# Altium PCB pagerboardv2.PcbDoc
Units mil, origin at the board's own origin, x right, y up, seen from the top; angles counter-clockwise.
Board outline 2250 x 5120 mil, 2 copper layers (Top Layer, Bottom Layer); 26 components, 26 nets, 107 pads, 24 vias.
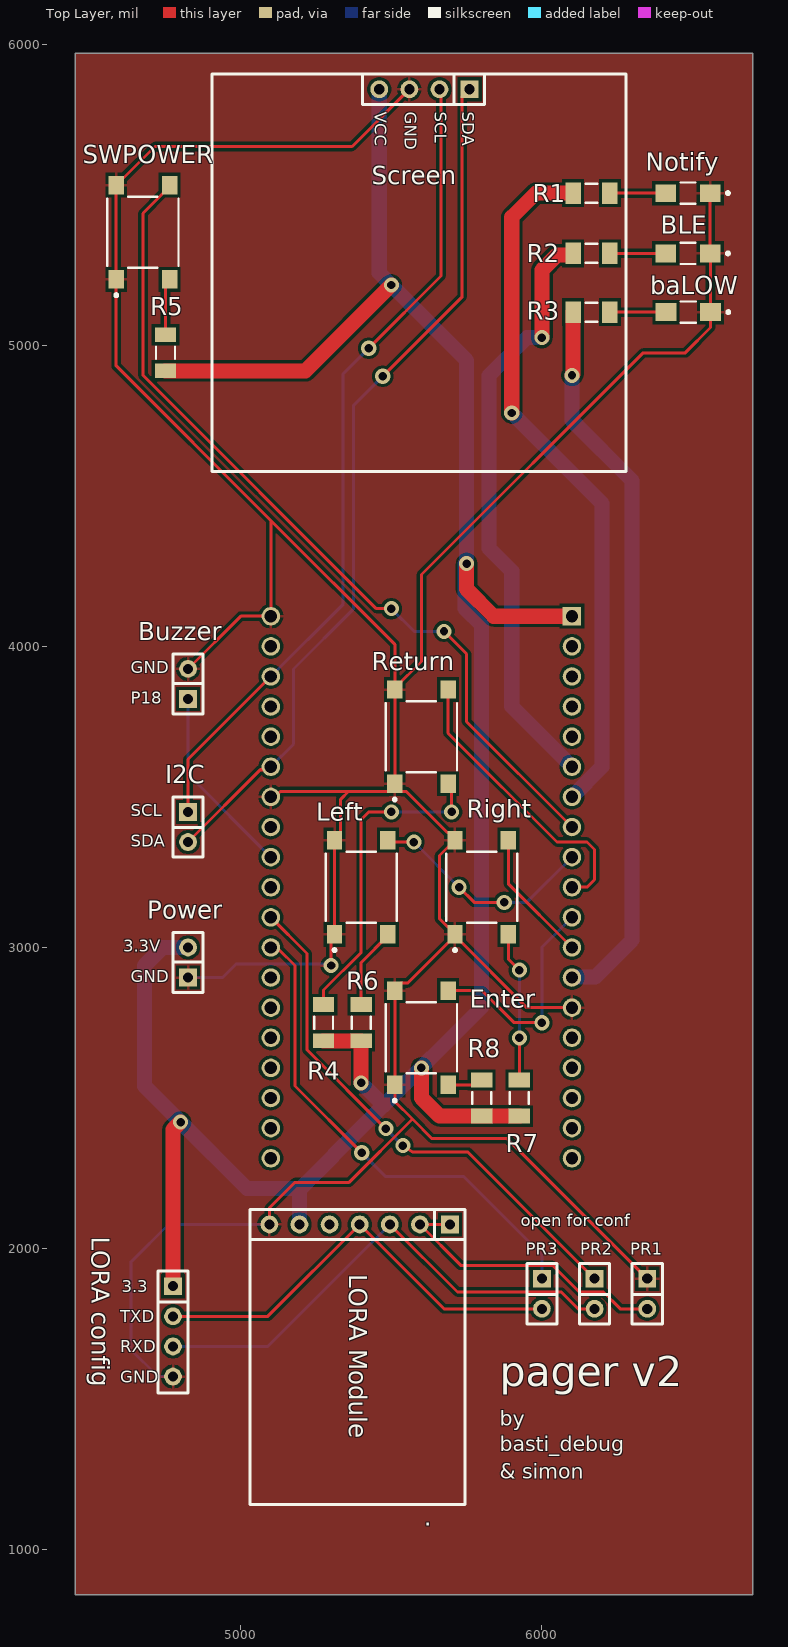
[diagram p0: Top Layer view]
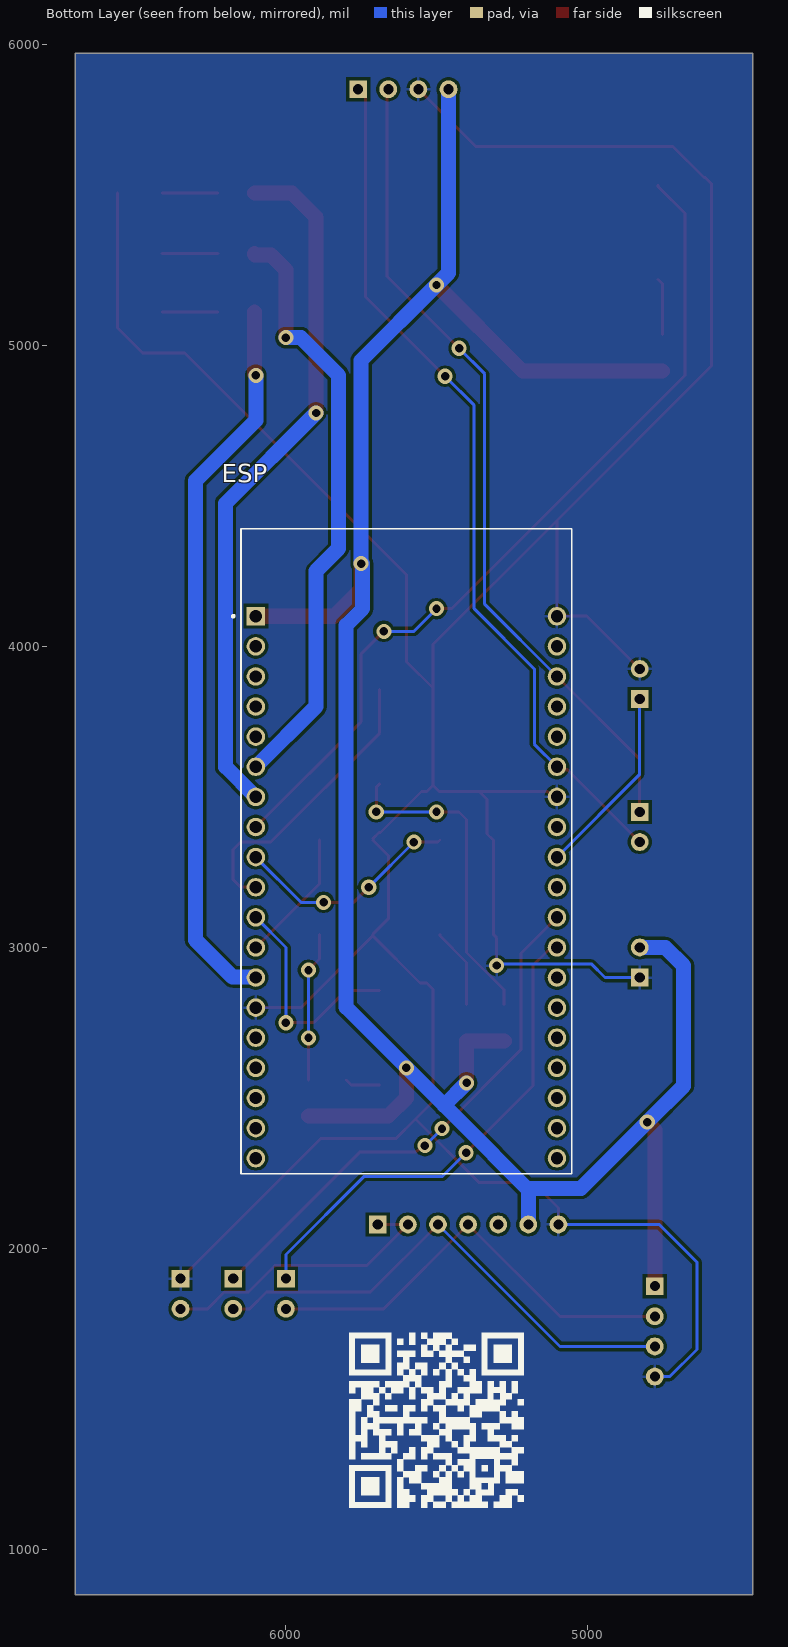
[diagram p1: Bottom Layer view, seen from below]

## Layer stack, top to bottom
Top Solder: solder mask 0.4, Solder Resist, Dk 3.5
Top Layer: signal copper 1.4
Dielectric 1: dielectric 12.6, FR-4, Dk 4.8
Bottom Layer: signal copper 1.4
Bottom Solder: solder mask 0.4, Solder Resist, Dk 3.5

## Board outline
4450,5970 6700,5970 6700,850 4450,850

## Design rules (kind name [scope] priority, off if disabled: settings)
Clearance [All] p1: gap=10 ignorepadtopadclearanceinfootprint=FALSE except(0: Arc-Hole Track-Hole SMDPad-Hole THPad-Hole Via-Hole Fill-Hole Poly-Hole Region-Hole Text-Hole)
PolygonConnect [All] p1: connectstyle=Relief reliefconductorwidth=10 reliefentries=4 polygonreliefangle="90 Angle" airgapwidth=10
RoutingVias [All] p1: holewidth=28 width=50 viastyle="Through Hole" minholewidth=28 minwidth=50 maxholewidth=28 maxwidth=50
SolderMaskExpansion [All] p1: expansion=4 istentingtop=FALSE
Width [All] p1: maxlimit=50 minlimit=10 preferedwidth=50 minimp=50.000000 maximp=50.000000 favimp=50.000000
30 further rules are at their usual default settings.

## Classes and differential pairs
component class pagerv2: 23 . ESP "LORA config" Power PR1 PR2 PR3
component class pagerv2IO: Buzzer Enter I2C Left R1 Return Right

## Components (designator, comment, footprint, x,y, rotation, side; value= is the part's Value field where it differs from the comment)
. "LORAModule" LORAmodule 5350,2075 r180 top
baLOW "APTD3216CGCK" FP-APTD3216CGCK-MFG 6486.18,5110 r180 top (schematic designator BatteryLow)
BLE "APTD3216CGCK" FP-APTD3216CGCK-MFG 6485,5305 r180 top (schematic designator Bluetooth)
Buzzer "2pin" 2PIN 4825,3875 r90 top
Enter "PTS645SH50SMTR92LFS" FP-PTS645SH50SMTR92LFS-MFG 5600,2700 r90 top
ESP "ESP32-DEVKITC-32D" MODULE_ESP32-DEVKITC-32D 5600,3322.05 r180 bottom (schematic designator U1)
I2C "2pin" 2PIN 4825,3400 r270 top
Left "PTS645SH50SMTR92LFS" FP-PTS645SH50SMTR92LFS-MFG 5400,3200 r90 top
"LORA config" "LoraPins" 4pin 4780,1720 r270 top (schematic designator *)
Notify "APTD3216CGCK" FP-APTD3216CGCK-MFG 6485,5505 r180 top (schematic designator Notification)
Power "2pin" 2PIN 4825,2950 r90 top
PR1 "jumper" jumper 6350,1850 r270 top
PR2 "jumper" jumper 6175,1850 r270 top
PR3 "jumper" jumper 6000,1850 r270 top
R1 "CRCW1206220RFKEA" RESC3216X60X45ML10T20 6165,5505 r0 top
R2 "CRCW1206220RFKEA" RESC3216X60X45ML10T20 6165,5305 r0 top
R3 "CRCW1206220RFKEA" RESC3216X60X45ML10T20 6165,5110 r0 top
R4 "RC1206FR-0710KL" RESC3116X65X40ML10T20 5275,2750 r90 top
R5 "RC1206FR-0710KL" RESC3116X65X40ML10T20 4750,4975 r90 top
R6 "RC1206FR-0710KL" RESC3116X65X40ML10T20 5400,2750 r90 top
R7 "RC1206FR-0710KL" RESC3116X65X40ML10T20 5925,2500 r90 top
R8 "RC1206FR-0710KL" RESC3116X65X40ML10T20 5800,2500 r90 top
Return "PTS645SH50SMTR92LFS" FP-PTS645SH50SMTR92LFS-MFG 5600,3700 r90 top
Right "PTS645SH50SMTR92LFS" FP-PTS645SH50SMTR92LFS-MFG 5800,3200 r90 top
SWPOWER "PTS645SH50SMTR92LFS" FP-PTS645SH50SMTR92LFS-MFG 4675,5375 r90 top
? "Screen" SCREEN 5595,4575 r0 top

## Footprints (in the part's own frame and the unit in brackets; to place one, negate y for a bottom-side part, rotate by r counter-clockwise, add the part's x,y. Pads: shape width x height; smd on the part's side, far side on the other; paste and mask are expansions set on the pad)
2PIN [mm]
  rect 1.5x1.5 hole 0.85: 1(-1.27,0)
  round 1.5 hole 0.85: 2(1.27,0)
  silkscreen extent -2.54,-1.27 2.54,1.27
4pin [mm]
  rect 1.5x1.5 hole 0.85: 1(-3.937,-0.127)
  round 1.5 hole 0.85: 2(-1.397,-0.127) 3(1.143,-0.127) 4(3.683,-0.127)
  silkscreen extent -5.21,-1.4 5.08,1.14
FP-APTD3216CGCK-MFG [mm]
  rect 1.75x1.5 smd paste+0 mask+0: 1(-1.875,0) 2(1.875,0)
  silkscreen extent -3.5,-0.9 0.63,0.9, body extent -2.85,-1 2.85,1, height 0.25
FP-PTS645SH50SMTR92LFS-MFG [mm]
  rect 1.55x1.3 smd paste+0 mask+0: 1(-3.975,2.25) 2(3.975,2.25) 3(-3.975,-2.25) 4(3.975,-2.25)
  silkscreen extent -5.42,-3 3,3, body extent -4.85,-3.1 4.85,3.1, height 0.25
jumper [mm]
  rect 1.5x1.5 hole 0.85: 1(-1.27,0)
  round 1.5 hole 0.85: 2(1.27,0)
  silkscreen extent -2.54,-1.27 2.54,1.27
LORAmodule [mm]
  round 1.5 hole 0.85: AUX(1.397,-0.127) GND(6.477,-0.127) M1(-6.223,-0.127) RXD(-3.683,-0.127) TXD(-1.143,-0.127) VCC(3.937,-0.127)
  rect 1.5x1.5 hole 0.85: M0(-8.763,-0.127)
  silkscreen extent -10.03,-1.4 8.13,23.49
MODULE_ESP32-DEVKITC-32D [mm]
  rect 1.56x1.56 / inner round 1.56 / far side rect 1.56x1.56 hole 1.04: J2-1(-12.7,19.76)
  round 1.56 hole 1.04: J2-2(-12.7,17.22) J2-3(-12.7,14.68) J2-4(-12.7,12.14) J2-5(-12.7,9.6) J2-6(-12.7,7.06) J2-7(-12.7,4.52) J2-8(-12.7,1.98) J2-9(-12.7,-0.56) J2-10(-12.7,-3.1) J2-11(-12.7,-5.64) J2-12(-12.7,-8.18) J2-13(-12.7,-10.72) J2-14(-12.7,-13.26) J2-15(-12.7,-15.8) J2-16(-12.7,-18.34) J2-17(-12.7,-20.88) J2-18(-12.7,-23.42) J2-19(-12.7,-25.96) J3-1(12.7,19.76) J3-2(12.7,17.22) J3-3(12.7,14.68) J3-4(12.7,12.14) J3-5(12.7,9.6) J3-6(12.7,7.06) J3-7(12.7,4.52) J3-8(12.7,1.98) J3-9(12.7,-0.56) J3-10(12.7,-3.1) J3-11(12.7,-5.64) J3-12(12.7,-8.18) J3-13(12.7,-10.72) J3-14(12.7,-13.26) J3-15(12.7,-15.8) J3-16(12.7,-18.34) J3-17(12.7,-20.88) J3-18(12.7,-23.42) J3-19(12.7,-25.96)
  silkscreen extent -14.7,-27.25 13.95,27.15, body extent -13.97,-24.8 13.97,30.3, height 7.06
RESC3116X65X40ML10T20 [mm] "Chip Resistor, 2-Leads, Body 3.10x1.60mm, IPC Low Density"
  rect 1.25x1.8 smd: 1(-1.525,0) 2(1.525,0)
  silkscreen extent -0.5,-0.8 0.5,0.8, body extent -1.6,-0.85 1.6,0.85, height 0.65
RESC3216X60X45ML10T20 [mm] "Chip Resistor, 2-Leads, Body 3.20x1.60mm, IPC Low Density"
  rect 1.3x1.8 smd: 1(-1.55,0) 2(1.55,0)
  silkscreen extent -0.5,-0.8 0.5,0.8, body extent -1.65,-0.85 1.65,0.85, height 0.6
SCREEN [mm]
  round 1.5 hole 0.85: GND(-0.889,32.385) SCL(1.651,32.385) VCC(-3.429,32.385)
  rect 1.5x1.5 hole 0.85: SDA(4.191,32.385)
  silkscreen extent -17.53,0.13 17.4,33.66

## Part data
baLOW BLE Notify: library part CMP-2000-05792-2, "LED GREEN CLEAR 2SMD", Case Code (Imperial)=1206, Case Code (Metric)=3216, Color=Green, Forward Current=20mA, Forward Voltage=2.1V, Lens Color=Clear, Max Operating Temperature=85°C, Min Operating Temperature=-40°C, Package Quantity=2000, Case/Package=1206, Dominant Wavelength=570nm, Height=1.8mm, Illumination Color=Green, Lead Free="Lead Free", Length=3.2mm, Lens Style=Clear, Luminous Intensity=300mcd, Mount="Surface Mount", Number of LEDs=1, Number of Pins=2, Packaging="Tape and Reel", Test Current=20mA, Viewing Angle=50°, Width=1.6mm
Enter Left Return Right SWPOWER: library part CMP-10040-000028-1, "SWITCH TACTILE SPST-NO 0.05A 12V", Case/Package=SMD/SMT, Color=Black, Current Rating=50mA, Max Operating Temperature=60°C, Max Voltage Rating (DC)=12V, Min Operating Temperature=-20°C, Operating Force=200gf, Package Quantity=1000, Actuator Material=Nylon, Actuator Type=Standard, Contact Material=Bronze, Contact Plating=Silver, Depth=9mm, Illumination Type=Non-Illuminated, Lead Free="Lead Free", Length=6mm, Max Current Rating=50mA, Mechanical Life=100000Cycles, Mount="Surface Mount", Orientation=Straight, Packaging="Tape and Reel", REACH SVHC="No SVHC", Switch Function=Off-Mom, Termination="Gull Wing", Throw Configuration=SPST, Voltage Rating (DC)=12V
ESP: library part CMP-015-000000-1, "WiFi Development Tools (802.11) ESP32 General Development Kit, ESP32-WROOM-32D on the board", Package=None, Availability="In Stock", Check_prices=https://www.snapeda.com/parts/ESP32-DEVKITC-32D/Espressif+Systems/view-part/?ref=eda, Component Type=Standard, Design Item ID=ESP32-DEVKITC-32D, MF="Espressif Systems", MP=ESP32-DEVKITC-32D, Pin Count=38, Price=None, Purchase-URL=https://pricing.snapeda.com/search/part/ESP32-DEVKITC-32D/?ref=eda, SnapEDA_Link=https://www.snapeda.com/parts/ESP32-DEVKITC-32D/Espressif+Systems/view-part/?ref=snap, Source=ESP32-DEVKITC-32D.SchLib
R1 R2 R3: library part CMP-2003-01956-1, Manufacturer="Vishay Dale", Part Number=CRCW1206220RFKEA
R4 R5 R6 R7 R8: library part CMP-1014-00623-2, "Chip Resistor, 10 KOhm, +/- 1%, 0.25 W, -55 to 155 degC, 1206 (3216 Metric), RoHS, Tape and Reel", Case Code (Imperial)=1206, Case Code (Metric)=3216, Manufacturer=Yageo, Max Operating Temperature=155degC, Min Operating Temperature=-55degC, Package Description="2-Pin Surface Mount Device, Body 3.1 x 1.6 mm", Package Quantity=5000, Package Reference=1206.0, Power Rating=250mW, Resistance=10KOhm, Temperature Coefficient=100ppm/degreesC, Tolerance=1%, Voltage Rating=200V, Case/Package=1206, Composition=ThickFilm, Datasheet URL=http://www.yageo.com/NewPortal/yageodocoutput?fileName=/pdf/R-Chip/PYu-RC_Group_51_RoHS_L_5.pdf, Datasheet Version="Rev. 5, 10/2016", Depth=1.6mm, Height=0.55mm, Lead Free=LeadFree, Length=3.1mm, Manufacturer URL=http://www.yageo.com/, Military Standard=Not, Packaging=TapeandReel, REACH SVHC=Unknown, RoHSCompliant=true, Termination=SMD/SMT, Width=1.6mm

## Via types
v1: diameter 50, hole 28, Top Layer to Bottom Layer, 24 vias

## Nets (pads, with @x,y where several pads share a name; then routed paths per layer and width w, separated by ;. In a path a pad name is that pad's centre, name@x,y a point inside that pad or via, vN(x,y) a via of type N, cw(c..) or ccw(c..) an arc to the next point about the centre after c; other vN are vias at no path point)
3.3: "LORA config.1" ..VCC ?.VCC ESP.J2-1 Power.2 R4.1 R5.1 R6.1 R7.1 R8.1 | length 8107.9
  Top Layer w50: R5.1 5214.96,4914.96 v1(5500,5200) ; 4775,1875 4775,2395 v1(4800,2420) ; R4.1 R6.1 v1(5400,2550) ; v1(5600,2600) 5600,2500 5660.04,2439.96 R8.1 R7.1 ; v1(5750,4275) 5750,4190 5840,4100 ESP.J2-1
  Bottom Layer w50: Power.2 4740,3000 4680,2940 4680,2540 v1(4800,2420) 5020,2200 5190,2200 5195,2195 ; ..VCC 5195,2195 ; v1(5400,2550) 5474.29,2475.71 ; ?.VCC 5460,5240 v1(5500,5200) 5750,4950 v1(5750,4275) ; 5475,2475 5474.29,2475.71 ; v1@5745,4275 5745,4125 5800,4070 5800,2801.42 5474.29,2475.71 ; 5195,2195 5308.36,2308.36 5308.36,2309.78 5474.29,2475.71
GND: "LORA config.4" ..GND ?.GND baLOW.1 BLE.1 Buzzer.2 Enter.1 Enter.2 ESP.J2-14 ESP.J3-1 ESP.J3-7 Left.1 Left.2 Notify.1 Power.1 PR1.1 Return.1 Return.2 Right.1 Right.2 SWPOWER.1 SWPOWER.2 | length 12312
  Top Layer w10: Buzzer.2 5000,4100 ESP.J3-1 5100,4417.91 ; ..GND 5095,2135 5180,2220 5360,2220 5570,2430 ; ESP.J3-7 5113.57,3500 5131.57,3517.99 5357.99,3517.99 ; v1(5300,2940) 5300,3032.09 Left.1 Left.2 5332.01,3377.09 5332.01,3492.01 5357.99,3517.99 ; Return.2@5511.42,3861.42 5600,3950 5600,4238.43 6336.57,4975 6476.18,4975 6560,5058.82 baLOW.1 6560,5303.82 BLE.1 Notify.1 ; ?.GND 5370,5660 4714.92,5660 4611.93,5557.01 4607.01,5557.01 4586.42,5536.42 SWPOWER.2 SWPOWER.1 4586.42,4931.5 5100,4417.91 ; Right.1 5660,3094.92 5660,3305.08 Right.2 ; Right.2@5711.42,3361.42 5690.83,3382.01 5685.91,3382.01 5549.92,3517.99 5532.01,3517.99 Return.1@5511.42,3538.58 ; ESP.J2-14 5950,2800 5711.42,3038.58 5554.84,2882.01 5532.01,2882.01 5511.42,2861.42 Enter.2 Enter.1 5511.42,2488.58 5570,2430 ; PR1.1 5885,2365 5635,2365 5570,2430 ; 5100,4417.91 5511.42,4006.5 Return.2 Return.1 Return.1@5511.42,3538.58 ; 5357.99,3517.99 5490.83,3517.99 Return.1@5511.42,3538.58
  Bottom Layer w10: 4775,1575 4725,1575 4635,1665 4635,1955 4760,2080 ..GND ; Power.1 4940,2900 4985.71,2945.71 5294.29,2945.71 v1(5300,2940)
Net*_2: "LORA config.2" ..TXD PR3.2 | length 1467.3
  Top Layer w10: 4775,1775 5090,1775 ..TXD 5675,1800 PR3.2
Net*_3: "LORA config.3" ..RXD PR2.2 | length 1683.7
  Top Layer w10: ..RXD 5719.53,1855.47 6064.53,1855.47 6120,1800 PR2.2
  Bottom Layer w10: 4775,1675 5090,1675 ..RXD
Net._M0: ..M0 ..M1 PR1.2 | length 971.1
  Top Layer w10: ..M0 ..M1 5730.47,1944.53 6035.74,1944.53 6044.53,1935.74 6044.53,1935.47 6124.53,1855.47 6204.53,1855.47 6260,1800 PR1.2
Net_SCL: ?.SCL ESP.J3-3 I2C.1 | length 2750
  Top Layer w10: I2C.1 4825,3625 ESP.J3-3 ; v1(5425,4990) 5665,5230 5665,5845 ?.SCL
  Bottom Layer w10: ESP.J3-3 5340,4140 5340,4905 v1(5425,4990)
Net_SDA: ?.SDA ESP.J3-6 I2C.2 | length 2901.9
  Top Layer w10: I2C.2 5065.16,3590.16 5090.16,3590.16 ESP.J3-6 ; v1(5471.49,4896.99) 5735.47,5160.98 5735.47,5825.47 ?.SDA
  Bottom Layer w10: ESP.J3-6 5175,3675 5175,3925 5375,4125 5375,4800.5 v1(5471.49,4896.99)
NetBatteryLow_2: baLOW.2 R3.2 | length 186.3
  Top Layer w10: R3.2 baLOW.2
NetBluetooth_2: BLE.2 R2.2 | length 185.2
  Top Layer w10: R2.2 BLE.2
NetBuzzer_1: Buzzer.1 ESP.J3-9 | length 638.9
  Bottom Layer w10: Buzzer.1 4825,3575 ESP.J3-9
NetEnter_3: Enter.3 R8.2 | length 118.3
  Top Layer w10: Enter.3 5783.46,2543.5 R8.2
NetEnter_4: Enter.4 ESP.J2-11 | length 747
  Top Layer w10: Enter.4 5801.34,2856.5 5907.83,2750 v1(6000,2750)
  Bottom Layer w10: v1(6000,2750) 6000,3000 ESP.J2-11
NetLeft_3: Left.3 R6.2 | length 270.2
  Top Layer w10: R6.2 5400,2950 5488.58,3038.58 Left.3
NetLeft_4: ESP.J2-9 Left.4 | length 759.1
  Top Layer w10: Left.4 5495.08,3350 v1(5575,3350) ; v1(5725,3200) 5775,3150 v1(5875,3150)
  Bottom Layer w10: v1(5575,3350) v1(5725,3200) ; v1(5875,3150) 5950,3150 ESP.J2-9
NetNotification_2: Notify.2 R1.2 | length 185.2
  Top Layer w10: R1.2 Notify.2
NetPR2_1: ESP.J3-11 PR2.1 | length 1757
  Top Layer w10: ESP.J3-11 5220,2980 5220,2660 v1(5481.72,2398.28) ; v1(5538.28,2341.72) 5571.46,2320 5579.74,2320 5755,2320 PR2.1
  Bottom Layer w10: v1(5481.72,2398.28) v1(5538.28,2341.72)
NetPR3_1: ESP.J3-12 PR3.1 | length 1653.4
  Top Layer w10: ESP.J3-12 5109.84,2990.16 5129.84,2990.16 5180,2940 5180,2540 v1(5401.72,2318.28)
  Bottom Layer w10: v1@5401.72,2301.72 v1(5401.72,2318.28) 5480,2240 5740,2240 6000,1980 PR3.1
NetR1_1: ESP.J2-7 R1.1 | length 2327.8
  Top Layer w50: v1(5900,4775) 5900,5425 5980,5505 R1.1
  Bottom Layer w50: v1(5900,4775) 6200,4475 6200,3600 ESP.J2-7
NetR2_1: ESP.J2-6 R2.1 | length 1995
  Top Layer w50: v1(6000,5025) 6000,5250 6050,5300 6103.39,5300 6103.98,5300.59 R2.1
  Bottom Layer w50: v1(6000,5025) 5950,5025 5825,4900 5825,4325 5900,4250 5900,3800 ESP.J2-6
NetR3_1: ESP.J2-13 R3.1 | length 2421.3
  Top Layer w50: v1(6100,4900) 6103.98,4903.98 R3.1
  Bottom Layer w50: ESP.J2-13 6102.18,2902.18 6177.18,2902.18 6300,3025 6300,4550 6100,4750 v1(6100,4900)
NetR4_2: R4.2 Return.3 | length 1075.3
  Top Layer w10: R4.2 5275,2858.43 5400,2983.43 5400,3425 5425,3450 v1(5500,3450) ; Return.3 5700,3532.09 v1(5700,3450)
  Bottom Layer w10: v1(5500,3450) v1(5700,3450)
NetR5_2: R5.2 SWPOWER.3 | length 189.1
  Top Layer w10: R5.2 4750,5204.92 SWPOWER.3
NetR7_2: R7.2 Right.3 | length 498.5
  Top Layer w10: Right.3 5888.58,2961.42 v1(5925,2925) ; R7.2 v1(5925,2700)
  Bottom Layer w10: v1(5925,2700) v1(5925,2925)
NetReturn_4: ESP.J2-10 Return.4 | length 976.9
  Top Layer w10: Return.4 5688.58,3711.42 6050,3350 6150,3350 6175,3325 6175,3225 6150,3200 ESP.J2-10
NetRight_4: ESP.J2-12 Right.4 | length 444.1
  Top Layer w10: Right.4 5888.58,3211.42 ESP.J2-12
NetSWPOWER_4: ESP.J2-8 SWPOWER.4 | length 2846.3
  Top Layer w10: SWPOWER.4 4763.58,5526.57 4675,5437.99 4675,4900 5450,4125 v1(5500,4125) ; v1(5675,4050) 5750,3975 5750,3750 ESP.J2-8
  Bottom Layer w10: v1(5500,4125) 5575,4050 v1(5675,4050)
pads on no net: ..AUX ESP.J2-2 ESP.J2-3 ESP.J2-4 ESP.J2-5 ESP.J2-15 ESP.J2-16 ESP.J2-17 ESP.J2-18 ESP.J2-19 ESP.J3-2 ESP.J3-4 ESP.J3-5 ESP.J3-8 ESP.J3-10 ESP.J3-13 ESP.J3-14 ESP.J3-15 ESP.J3-16 ESP.J3-17 ESP.J3-18 ESP.J3-19

## Polygon pours and split planes (outlines as drawn)
GND on Top Layer "GND_L01_P001" (solid, pour order 1): 4450,5970 6700,5970 6700,850 4450,850
GND on Bottom Layer "GND_L02_P000" (solid, pour order 0): 4450,850 6700,850 6700,5970 4450,5970

## Silkscreen, mask and mechanical layers (free items; w line width, h text height)
Top Overlay:
  text "GND" at 4635,3910 h40
  text "P18" at 4635,3810 h40
  text "SCL" at 4635,3435 h40
  text "SDA" at 4635,3335 h40
  text "3.3V" at 4610,2985 h40
  text "GND" at 4635,2885 h40
  text "open for conf" at 5930,2073.33 h40
  text "3.3" at 4605,1855 h40
  text "TXD" at 4600,1755 h40
  text "RXD" at 4600,1655 h40
  text "GND" at 4600,1555 h40
  text "pager v2" at 5860,1543.33 h100
  text "by" at 5860,1411.66 h50
  text "basti_debug" at 5860,1326.66 h50
  text "& simon" at 5860,1235 h50
Bottom Overlay:
  drawing of 54 lines, arcs and shapes, not listed

## Text inside footprints (layer, text, board x,y; h text height)
.: Top Overlay "LORA Module" at 5360,1915 h60 r270
?: Top Overlay "VCC" at 5445,5775 h40 r270; Top Overlay "GND" at 5545,5775 h40 r270; Top Overlay "SCL" at 5645,5775 h40 r270; Top Overlay "SDA" at 5735,5775 h40 r270